# Altium PCB PCB1.PcbDoc
Units mm, origin at the board's own origin, x right, y up, seen from the top; angles counter-clockwise.
Board outline 219.07 x 105.41 mm, 2 copper layers (Top Layer, Bottom Layer); 56 components, 44 nets, 192 pads, 36 vias.
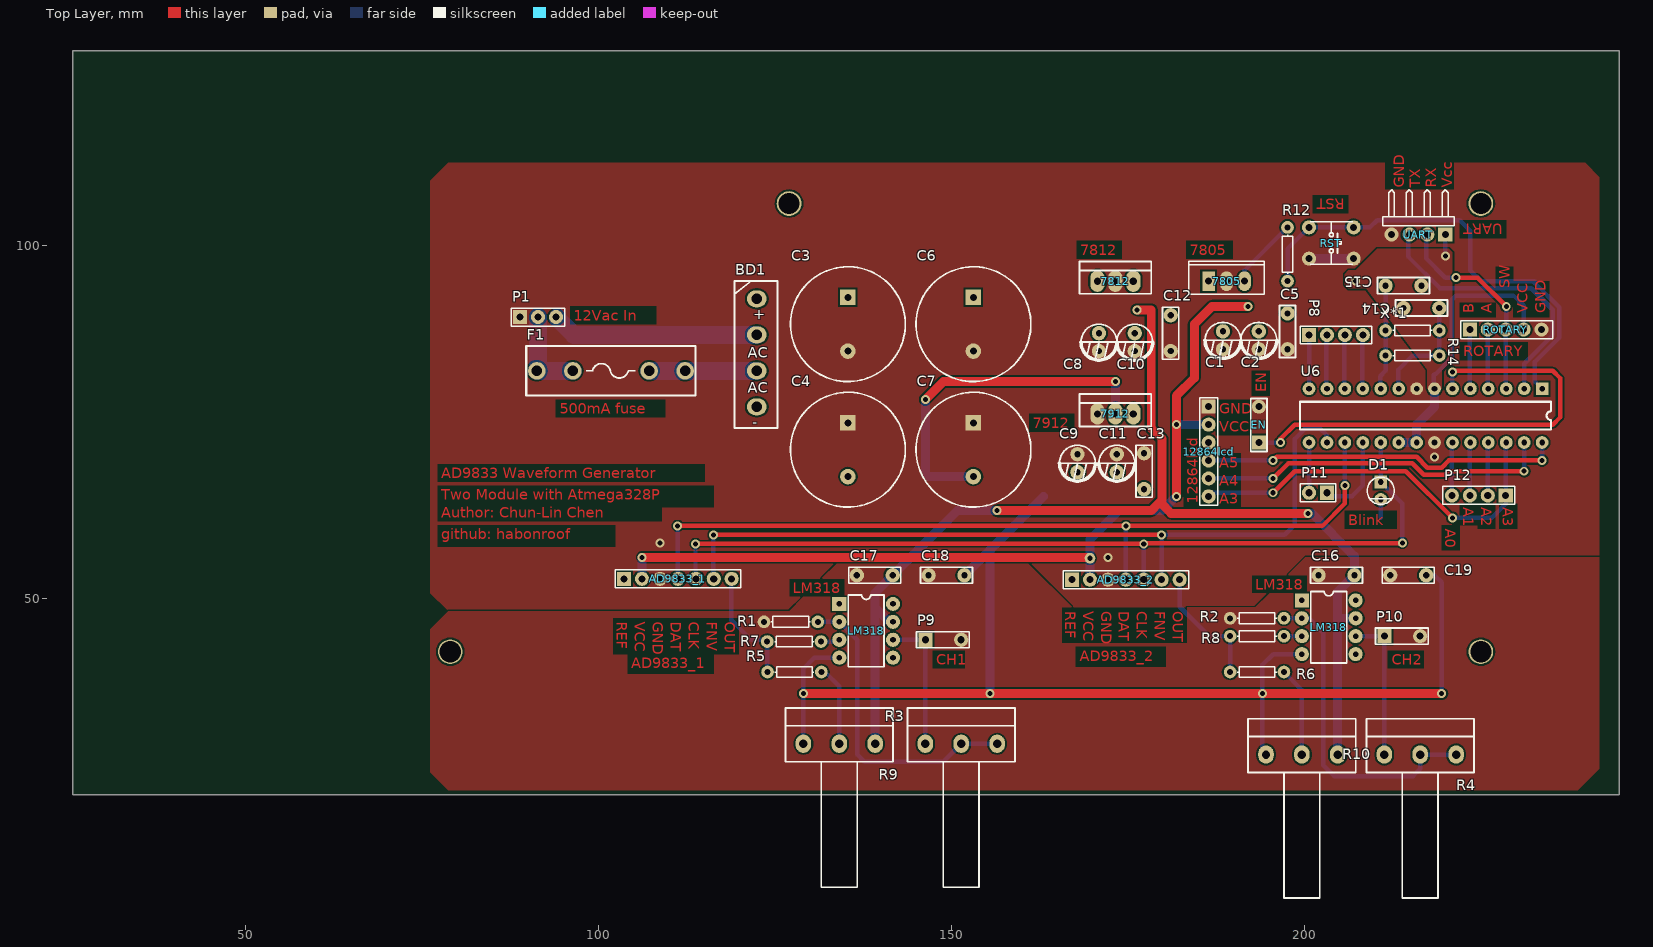
[diagram p0: Top Layer view]
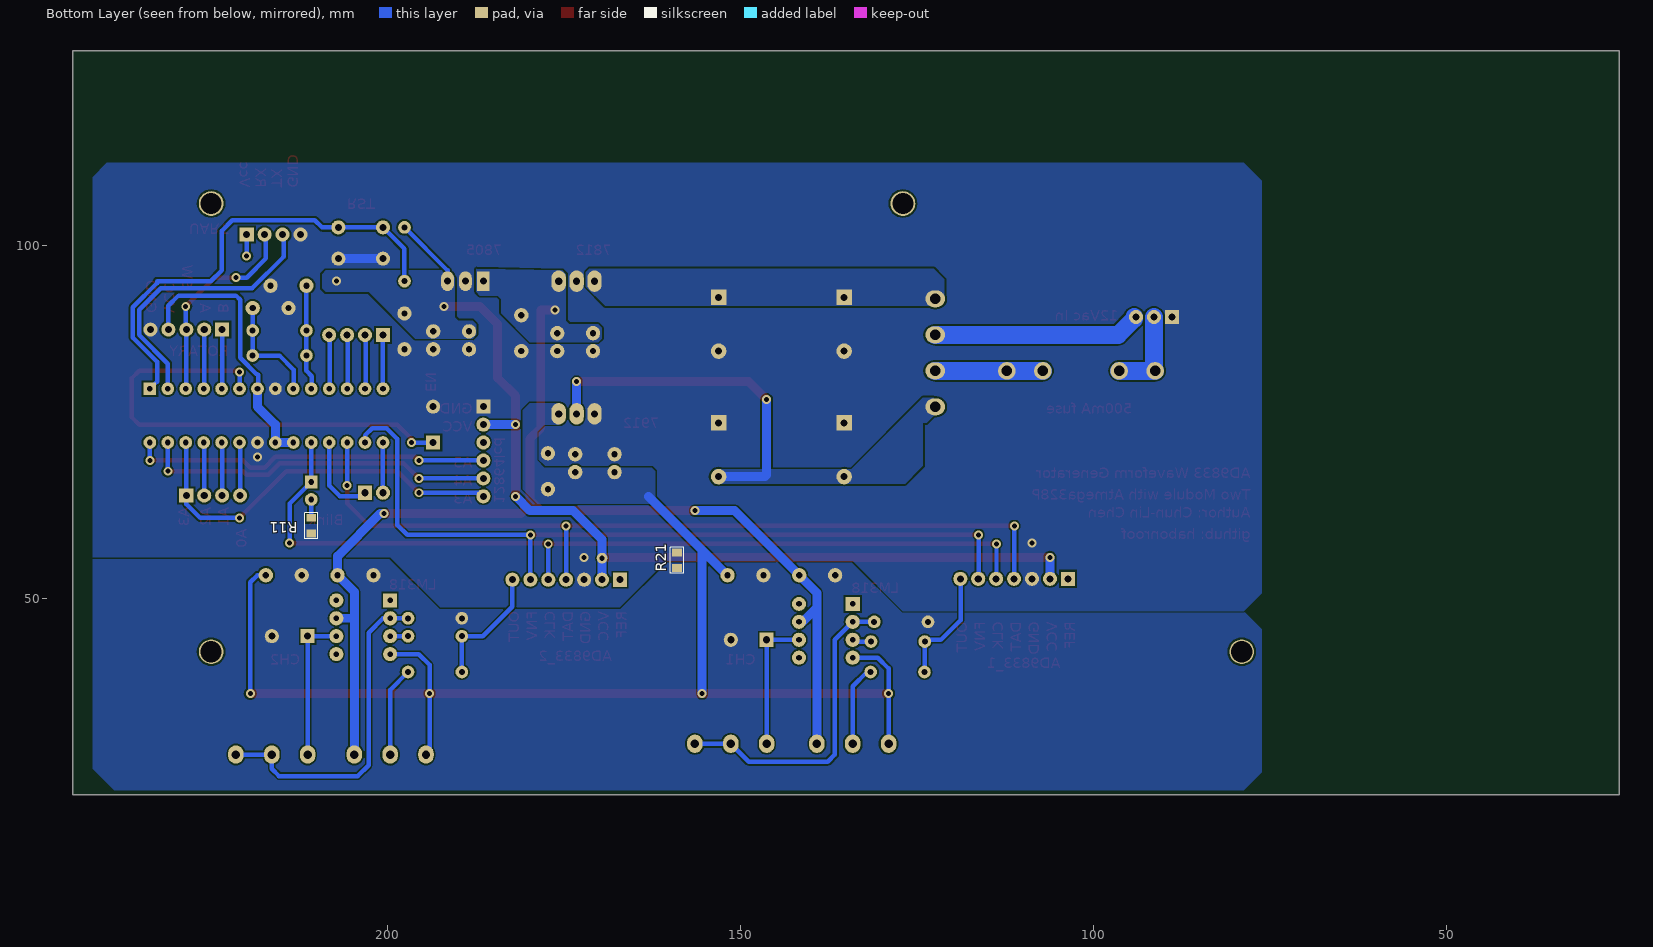
[diagram p1: Bottom Layer view, seen from below]

## Layer stack, top to bottom
Top Solder: solder mask 0.0102, Solder Resist, Dk 3.5
Top Layer: signal copper 0.0356
Dielectric 1: dielectric 0.32, FR-4, Dk 4.8
Bottom Layer: signal copper 0.0356
Bottom Solder: solder mask 0.0102, Solder Resist, Dk 3.5

## Board outline
25.527,22.225 244.602,22.225 244.602,127.635 25.527,127.635

## Design rules (kind name [scope] priority, off if disabled: settings)
Clearance [All] p1: gap=0.254
PlaneConnect [All] p1: planeconnectstyle=Direct reliefexpansion=0.508 reliefentries=4 reliefconductorwidth=0.254 reliefairgap=0.254
PolygonConnect [All] p1: connectstyle=Direct reliefconductorwidth=0.254 reliefentries=4 polygonreliefangle="90 Angle" airgapwidth=0.254
RoutingVias [All] p1: holewidth=0.711 width=1.27 viastyle="Through Hole" minholewidth=0.711 minwidth=1.27 maxholewidth=0.711 maxwidth=1.27
SolderMaskExpansion [All] p1: expansion=0.102
Width [All] p1: maxlimit=5.08 minlimit=0.254 preferedwidth=1.27
29 further rules are at their usual default settings.

## Components (designator, comment, footprint, x,y, rotation, side; value= is the part's Value field where it differs from the comment)
7805 "Regulator_7805" TO-220#1 188.976,94.996 r0 top (schematic designator U1)
7812 "7812" TO-220#2 173.228,94.996 r0 top (schematic designator U2)
7912 "7915" TO-220#2 173.228,76.2 r0 top (schematic designator U3)
12864lcd "12684LCD" HDR1X6 186.436,77.216 r270 top (schematic designator P4)
AD9833_1 "AD9833 Module" HDR1X7 103.632,52.832 r0 top (schematic designator P5)
AD9833_2 "AD9833 Module" HDR1X7 167.085,52.705 r0 top (schematic designator P6)
BD1 "Bridge" Bridge_KBL406 124.841,83.987 r0 top
C1 "JACKON LHK 100uF/10V" RAD-100_200 188.468,86.614 r270 top
C2 "JACKON LHK 100uF/10V" RAD-100_200 193.548,86.614 r270 top
C3 "1000uF/50V" Cap_M_1000uF/50V 135.335,88.9 r270 top
C4 "1000uF/50V" Cap_M_1000uF/50V 135.335,71.12 r270 top
C5 "100n/100V" CAP-200_100*300 197.612,87.884 r90 top
C6 "1000uF/50V" Cap_M_1000uF/50V 153.115,88.9 r270 top
C7 "1000uF/50V" Cap_M_1000uF/50V 153.115,71.12 r270 top
C8 "JACKON LHK 47uF/35V" RAD-100_200 170.895,86.36 r270 top
C9 "JACKON LHK 47uF/35V" RAD-100_200 167.847,69.215 r270 top
C10 "JACKON LHK 47uF/35V" RAD-100_200 175.975,86.36 r270 top
C11 "JACKON LHK 47uF/35V" RAD-100_200 173.435,69.215 r270 top
C12 "100n/100V" CAP-200_100*300 181.055,87.63 r90 top
C13 "100n/100V" CAP-200_100*300 177.292,68.072 r90 top
C14 "22p/1kV" CAP-200_100*300 216.582,91.186 r0 top
C15 "22p/1kV" CAP-200_100*300 214.042,94.361 r180 top
C16 "100n/100V" CAP-200_100*300 204.55,53.34 r180 top
C17 "100n/100V" CAP-200_100*300 139.145,53.34 r180 top
C18 "100n/100V" CAP-200_100*300 149.305,53.34 r0 top
C19 "100n/100V" CAP-200_100*300 214.71,53.34 r0 top
D1 "LED" LED_SMALL 210.82,65.313 r0 top
EN "OUTPUT EN" HDR1X2_1 193.548,74.676 r90 top (schematic designator P2)
F1 "Fuse" FUSE 91.268,82.296 r0 top
LM318 "LM381" DIP-8 138.024,45.201 r0 top (schematic designator U4)
LM318 "LM381" DIP-8 203.556,45.709 r0 top (schematic designator U5)
P1 "12-0-12" HDR1X3 88.9,89.916 r0 top
P8 "Header 4" HDR1X4 200.66,87.376 r0 top
P9 "CH1_Out" HDR1X2_1 148.844,44.196 r0 top
P10 "CH2_out" HDR1X2_1 213.868,44.704 r0 top
P11 "Header 2" HDR1X2 203.2,65.024 r180 top
P12 "Header 4" HDR1X4 228.52,64.643 r180 top
R1 "2k" R-0.25W 127.254,46.736 r180 top
R2 "2k" R-0.25W 193.294,47.244 r180 top
R3 "100k" VR-Medium 151.384,29.464 r0 top
R4 "100k" VR-Medium 216.408,27.94 r0 top
R5 "2k" R-0.25W 127.762,39.624 r0 top
R6 "2k" R-0.25W 193.294,39.624 r0 top
R7 "2k" R-0.25W 127.715,43.942 r180 top
R8 "2k" R-0.25W 193.294,44.704 r180 top
R9 "10k" VR-Medium 134.112,29.464 r0 top
R10 "10k" VR-Medium 199.644,27.94 r0 top
R11 "220" RS0805 210.82,61.468 r90 bottom
R12 "10k" R-0.25W 197.612,98.806 r90 top
R14 "1M" R-0.25W 215.312,84.455 r180 top
R21 "0" RS0805 159.004,54.356 r270 bottom (schematic designator R13)
ROTARY "Header 5" HDR1X5 223.44,88.138 r0 top (schematic designator P3)
RST "SW PB" Button 203.82,100.401 r270 top (schematic designator S1)
U6 "IC" DIP-28 233.68,79.756 r270 top
UART "UART Port" HDR1X4H 219.964,101.6 r180 top (schematic designator P7)
X*1 "16MHz" R-0.25W 215.312,88.011 r180 top

## Footprints (in the part's own frame and the unit in brackets; to place one, negate y for a bottom-side part, rotate by r counter-clockwise, add the part's x,y. Pads: shape width x height; smd on the part's side, far side on the other; paste and mask are expansions set on the pad)
Bridge_KBL406 [mm]
  oval 2.8x2.4 hole 1.5: 1(-2.413,3.409) 2(-2.413,-1.691) 3(-2.413,8.509) 4(-2.413,-6.791)
  silkscreen extent -5.59,-9.78 0.51,11.05
Button [mm]
  round 2 hole 1: 1(-2.215,3.16) 1(-2.215,-3.16) 2(2.215,3.16) 2(2.215,-3.16)
  silkscreen extent -3,-3 3,3
CAP-200_100*300 [mil]
  round 80 hole 35: 1(-100,0) 2(100,0)
  silkscreen extent -145,-45 145,45, body extent -150,-50 150,50
Cap_M_1000uF/50V [mm] "Diameter : 16mm"
  rect 2.2x2.2 hole 1: 1(-3.81,0)
  round 2.2 hole 1: 2(3.81,0)
  silkscreen extent -8.13,-8.13 8.13,8.13
DIP-8 [mm] "DIP-8"
  rect 2x2 hole 0.8: 1(-3.912,4.075)
  round 2 hole 0.8: 2(-3.912,1.535) 3(-3.912,-1.005) 4(-3.912,-3.545) 5(3.708,-3.545) 6(3.708,-1.005) 7(3.708,1.535) 8(3.708,4.075)
  silkscreen extent -2.64,-4.81 2.44,5.35
DIP-28 [mm]
  rect 1.8x1.8 hole 0.8: 1(0,0)
  round 1.8 hole 0.8: 2(0,-2.54) 3(0,-5.08) 4(0,-7.62) 5(0,-10.16) 6(0,-12.7) 7(0,-15.24) 8(0,-17.78) 9(0,-20.32) 10(0,-22.86) 11(0,-25.4) 12(0,-27.94) 13(0,-30.48) 14(0,-33.02) 15(7.62,-33.02) 16(7.62,-30.48) 17(7.62,-27.94) 18(7.62,-25.4) 19(7.62,-22.86) 20(7.62,-20.32) 21(7.62,-17.78) 22(7.62,-15.24) 23(7.62,-12.7) 24(7.62,-10.16) 25(7.62,-7.62) 26(7.62,-5.08) 27(7.62,-2.54) 28(7.62,0)
  silkscreen extent 1.83,-34.29 5.79,1.27
FUSE [mm]
  round 2.5 hole 1.5: 1(0,0) 1(5.1,0) 2(15.9,0) 2(21,0)
  silkscreen extent -1.5,-3.5 22.5,3.5
HDR1X2 [mm]
  rect 2x2 hole 1: 1(0,0)
  round 2 hole 1: 2(2.54,0)
  silkscreen extent -1.27,-1.27 3.81,1.27
HDR1X2_1 [mm]
  rect 2x2 hole 1: 1(-2.54,0)
  round 2 hole 1: 2(2.54,0)
  silkscreen extent -3.81,-1.14 3.68,1.14
HDR1X3 [mm]
  rect 2x2 hole 1: 1(0,0)
  round 2 hole 1: 2(2.54,0) 3(5.08,0)
  silkscreen extent -1.27,-1.27 6.35,1.27
HDR1X4 [mm]
  rect 2x2 hole 1: 1(0,0)
  round 2 hole 1: 2(2.54,0) 3(5.08,0) 4(7.62,0)
  silkscreen extent -1.27,-1.27 8.89,1.27
HDR1X4H [mm]
  rect 2x2 hole 1: 1(0,0)
  round 2 hole 1: 2(2.54,0) 3(5.08,0) 4(7.62,0)
  silkscreen extent -1.27,-6.35 8.89,-1.27
HDR1X5 [mm]
  rect 2x2 hole 1: 1(0,0)
  round 2 hole 1: 2(2.54,0) 3(5.08,0) 4(7.62,0) 5(10.16,0)
  silkscreen extent -1.27,-1.27 11.72,1.27
HDR1X6 [mm]
  rect 2x2 hole 1: 1(0,0)
  round 2 hole 1: 2(2.54,0) 3(5.08,0) 4(7.62,0) 5(10.16,0) 6(12.7,0)
  silkscreen extent -1.27,-1.27 13.97,1.27
HDR1X7 [mm]
  rect 2x2 hole 1: 1(0,0)
  round 2 hole 1: 2(2.54,0) 3(5.08,0) 4(7.62,0) 5(10.16,0) 6(12.7,0) 7(15.24,0)
  silkscreen extent -1.27,-1.27 16.51,1.27
LED_SMALL [mm]
  rect 1.8x1.8 hole 0.8: 1(0,1.235)
  round 1.8 hole 0.8: 2(0,-1.235)
  silkscreen extent -1.92,-1.92 1.92,1.92
R-0.25W [mm]
  round 1.8 hole 0.85: 1(-3.81,0) 2(3.81,0)
  silkscreen extent -2.77,-0.76 2.77,0.76
RAD-100_200 [mil]
  round 80 hole 35: 1(-50,0) 2(50,0)
  silkscreen extent -100,-100 100,100, body extent -100,-100 100,100
RS0805 [mm]
  rect 1.1x1.4 smd mask+0.02: 1(0,0) 2(-2.2,0)
  silkscreen extent -2.95,-0.95 0.75,0.95
TO-220#1 [mm]
  rect 1.8x2.8 hole 1: 1(-2.54,0)
  oval 1.8x2.8 hole 1: 2(0,0) 3(2.54,0)
  silkscreen extent -5.35,-1.85 5.35,2.85
TO-220#2 [mm]
  oval 2.032x3.048 hole 1.016: 1(-2.54,0) 2(0,0) 3(2.54,0)
  silkscreen extent -5.08,-1.78 5.08,2.79, body extent -5.21,-1.91 5.21,2.92
VR-Medium [mm] "炭膜可變電阻"
  oval 2.2x2.6 hole 1.2: 1(-5.08,0) 2(0,0) 3(5.08,0)
  silkscreen extent -7.62,-20.32 7.62,5.08

## Part data
7805: library part Regulator-7805, "Voltage Regulator"
7812: library part 7805, "THREE TERMINAL POSITIVE VOLTAGE REGULATORS"
7912: "THREE TERMINAL NEGATIVE VOLTAGE REGULATORS"
12864lcd: library part "Header 6", "Header, 6-Pin"
AD9833_1 AD9833_2: library part "Header 7", "Header, 7-Pin"
BD1: "全波整流器"
C1 C2 C8 C9 C10 C11: "JACKON LHK General Purpose"
C3 C4 C6 C7: library part Cap_EC_Medium, "有極性電解電容(中)"
C5 C12 C13 C16 C17 C18 C19: "Metallized Polyester Film Capacitor"
C14 C15: "Ceramic Capacitor"
EN P9 P10: library part "Header 2", "Header, 2-Pin"
LM318 LM318: library part LM318, "Single OPA SR:50v/uS"
P1: library part "Header 3", "Header, 3-Pin"
P8 P12: "Header, 4-Pin"
P11: "Header, 2-Pin"
R1 R2 R5 R6 R7 R8 R11 R12 R14 R21: library part Resistor, "固定電阻"
R3 R4 R9 R10: library part Resistor_Potentiometer, "可變電阻"
ROTARY: "Header, 5-Pin"
RST: "Button Switch"
U6: library part Atmega328P, "Arduino controller"
UART: library part "Header 4", "Header, 4-Pin"
X*1: library part XTAL, "Crystal Oscillator"

## Free pads (board coordinates)
  round 3.5 hole 3: 2(79,42.5) 2(127,106) 2(225,42.5) 2(225,106)
  round 1.524 hole 0.762: 3(169.625,55.753)

## Via types
v1: diameter 1.27, hole 0.711, Top Layer to Bottom Layer, 36 vias

## Nets (pads, with @x,y where several pads share a name; then routed paths per layer and width w, separated by ;. In a path a pad name is that pad's centre, name@x,y a point inside that pad or via, vN(x,y) a via of type N, cw(c..) or ccw(c..) an arc to the next point about the centre after c; other vN are vias at no path point)
+12V: 7805.1 7812.3 C8.1 C10.1 C12.2 C16.1 C17.1 LM318.7 R9.3 R10.3 | length 163.1
  Top Layer w1.27: v1(156.464,62.484) 178.308,62.484 179.324,63.5 ; v1(176.276,90.932) 178.308,90.932 178.308,74.168 179.832,72.644 179.832,64.008 179.324,63.5 ; v1(200.533,62.103) 181.106,62.103 179.832,63.377 179.832,63.5 179.324,63.5
  Bottom Layer w1.27: R9.3 139.192,48.768 ; LM318.7@141.685,46.99 141.431,46.736 141.224,46.736 139.192,48.768 ; v1(156.464,62.484) 150.829,62.484 C17.1 139.192,50.847 139.192,48.768 ; v1(200.533,62.103) 201.041,62.103 207.09,56.054 C16.1 204.724,50.974 204.724,47.244 ; R10.3 204.724,47.244 ; LM318.7@207.264,47.244 204.724,47.244
-12V: 7912.3 C9.2 C11.2 C13.1 C18.2 C19.2 LM318.4 R9.1 R10.1 | length 180.2
  Top Layer w1.27: v1(129.032,36.576) v1(155.448,36.576) v1(194.056,36.576) v1(219.456,36.576)
  Bottom Layer w0.635: R9.1@129.032,29.972 v1(129.032,36.576) 129.032,40.132 130.556,41.656 133.303,41.656 133.811,42.164 LM318.4@134.065,41.91 ; C18.2 C18.2@151.892,53.34 ; R10.1 194.056,28.448 v1(194.056,36.576) 194.056,40.64 195.58,42.164 199.216,42.164 LM318.4@199.47,41.91 ; C19.2 218.44,53.34 219.456,52.324 v1(219.456,36.576)
  Bottom Layer w1.27: C18.2@151.892,53.34 155.448,56.896 ; v1(155.448,36.576) 155.448,56.896 ; 163.068,64.516 155.448,56.896
A: ROTARY.2 U6.4 | length 8.3
  Bottom Layer w0.635: U6.4@225.98,79.883 ROTARY.2
AGND: C16.2 C17.2 C18.1 C19.1 P9.2 P10.2 R1.2 R2.2 R21.1
B: ROTARY.1 U6.5 | length 8.3
  Bottom Layer w0.635: U6.5@223.44,79.883 ROTARY.1
BUSY: 12864lcd.6 P12.1 U6.26 | length 55.9
  Top Layer w0.635: v1(195.58,65.024) 198.628,68.072 214.376,68.072 v1(220.98,61.468)
  Bottom Layer w0.635: 12864lcd.6 186.944,65.024 v1(195.58,65.024) ; v1(220.98,61.468) 226.568,61.468 228.52,63.42 P12.1 U6.26@228.52,72.263
CH1_OUT: LM318.6@141.732,44.196 P9.1 R3.1 | length 19.3
  Bottom Layer w0.635: LM318.6@141.732,44.196 P9.1 R3.1
CH2_OUT: LM318.6@207.264,44.704 P10.1 R4.1 | length 21.3
  Bottom Layer w0.635: LM318.6@207.264,44.704 P10.1 ; R4.1 P10.1 ; P10.1@211.836,44.704 P10.1
D13: AD9833_1.5 AD9833_2.5 D1.1 U6.19 | length 125.4
  Top Layer w0.635: v1(113.745,57.785) v1(177.245,57.785) 177.309,57.848 v1@213.296,57.848 ; D1.1@210.82,66.478 D1.1
  Bottom Layer w0.635: AD9833_1.5@113.745,52.705 v1(113.745,57.785) ; AD9833_2.5 v1(177.245,57.785) v1@177.309,57.848 ; U6.19 D1.1 213.868,63.5 v1(213.868,57.912)
FNC: AD9833_1.6 AD9833_2.6 U6.16 | length 114.5
  Top Layer w0.635: v1(116.285,59.055) v1(179.785,59.055)
  Bottom Layer w0.635: AD9833_1.6@116.285,52.705 v1(116.285,59.055) ; AD9833_2.6 v1(179.785,59.055) 197.231,59.055 198.628,60.452 198.628,72.644 200.152,74.168 202.184,74.168 203.2,73.152 U6.16
GND: 7805.2 7812.2 7912.1 12864lcd.1 AD9833_1.3 AD9833_2.3 C1.2 C2.2 C3.2 C4.1 C5.1 C6.2 C7.1 C8.2 C9.1 C10.2 C11.1 C12.1 C13.2 C14.1 C15.1 EN.2 P1.1 R11.2 R21.2 ROTARY.5 RST.2 U6.8 U6.22 UART.4 | length 6.3
  Bottom Layer w1.27: RST.2@200.66,98.186 RST.2@206.98,98.186
  other v1: 172.212,55.88 108.712,57.912 218.44,70.104
NetBD1_1: BD1.1 P1.3 | length 29.4
  Bottom Layer w2.54: P1.3@94.234,89.916 94.234,89.662 96.5,87.396 BD1.1
NetBD1_2: BD1.2 F1.2 | length 15.3
  Bottom Layer w2.54: F1.2@107.168,82.296 112.268,82.296 BD1.2
NetBD1_3: 7812.1 BD1.3 C3.1 C6.1
NetBD1_4: 7912.2 BD1.4 C4.2 C7.2 | length 50.1
  Top Layer w1.27: v1(146.304,78.232) 148.844,80.772 v1(173.228,80.772)
  Bottom Layer w1.27: v1(146.304,78.232) 146.304,67.564 146.558,67.31 C7.2 ; 7912.2 v1(173.228,80.772)
NetC14_2: C14.2 R14.1 U6.9 X*1.1 | length 16
  Bottom Layer w0.635: U6.9@213.28,79.883 213.28,82.423 215.312,84.455 R14.1 X*1.1 C14.2
NetC15_2: C15.2 R14.2 U6.10 X*1.2 | length 14.8
  Bottom Layer w0.635: U6.10@210.74,79.883 210.74,81.534 211.502,82.296 R14.2 X*1.2 C15.2
NetD1_2: D1.2 R11.1 | length 2.5
  Bottom Layer w0.635: R11.1 D1.2@210.82,64.008
NetF1_1: F1.1 P1.2 | length 12.8
  Bottom Layer w2.54: P1.2 91.44,82.468 91.268,82.296 F1.1@96.368,82.296
NetP8_1: P8.1 U6.14 | length 7.6
  Bottom Layer w0.635: U6.14 P8.1
NetP8_2: P8.2 U6.13 | length 7.6
  Bottom Layer w0.635: U6.13@203.12,79.883 P8.2@203.12,87.503
NetP8_3: P8.3 U6.12 | length 7.6
  Bottom Layer w0.635: U6.12@205.66,79.883 P8.3@205.66,87.503
NetP8_4: P8.4 U6.11 | length 7.6
  Bottom Layer w0.635: U6.11@208.2,79.883 P8.4@208.2,87.503
NetP11_1: P11.1 U6.18 | length 12
  Bottom Layer w0.635: P11.1 203.708,64.516 206.756,64.516 208.28,66.04 U6.18
NetP11_2: P11.2 U6.15 | length 7.6
  Bottom Layer w0.635: P11.2@200.66,64.516 P11.2 U6.15
NetP12_2: P12.2 U6.25 | length 7.6
  Bottom Layer w0.635: P12.2 U6.25@225.98,72.263
NetP12_3: P12.3 U6.24 | length 7.6
  Bottom Layer w0.635: P12.3 U6.24@223.44,72.263
NetP12_4: P12.4 U6.23 | length 7.6
  Bottom Layer w0.635: P12.4 U6.23@220.9,72.263
NetR1_1: LM318.2@134.112,46.736 R1.1 R3.2 R3.3 | length 44.2
  Bottom Layer w0.635: R1.1 134.112,46.736 136.652,44.196 136.652,27.94 137.668,26.924 148.844,26.924 R3.2 R3.3
NetR2_1: LM318.2@199.644,47.244 R2.1 R4.2 R4.3 | length 47.1
  Bottom Layer w0.635: R2.1 199.644,47.244 200.66,47.244 202.692,45.212 202.692,26.416 204.216,24.892 215.392,24.892 216.408,25.908 R4.2 R4.3
NetR5_2: R5.2 R9.2 | length 11.5
  Bottom Layer w0.635: R5.2 132.08,39.624 134.112,37.592 R9.2
NetR6_2: R6.2 R10.2 | length 12.7
  Bottom Layer w0.635: R6.2 199.644,37.084 R10.2
NetR7_1: LM318.3@134.112,44.196 R7.1 | length 2.5
  Bottom Layer w0.635: R7.1 LM318.3@134.065,43.942
NetR8_1: LM318.3@199.644,44.704 R8.1 | length 2.5
  Bottom Layer w0.635: R8.1 LM318.3@199.644,44.704
NetR12_1: R12.1 RST.1 U6.1 | length 66.7
  Bottom Layer w0.635: R12.1 197.612,99.568 200.66,102.616 206.98,102.616 209.296,102.616 210.312,103.632 221.996,103.632 223.52,102.108 223.52,96.52 225.044,94.996 232.664,94.996 232.664,94.729 236.093,91.3 236.093,87.008 232.664,83.579 232.664,80.772 U6.1
"O/P EN": EN.1 U6.6 | length 68.1
  Top Layer w0.635: v1(196.596,72.136) 196.596,72.644 198.628,74.676 235.204,74.676 236.22,75.692 236.22,81.28 235.204,82.296 221.154,82.296 v1(220.98,82.122)
  Bottom Layer w0.635: EN.1 v1(196.596,72.136) ; U6.6 v1(220.98,82.122)
OUT1: AD9833_1.7 R5.1 R7.2 | length 16
  Bottom Layer w0.635: AD9833_1.7@118.825,52.705 118.825,46.99 121.619,44.196 123.905,44.196 R7.2 123.905,40.179 R5.1@123.952,40.132
OUT2: AD9833_2.7 R6.1 R8.2 | length 17.8
  Bottom Layer w0.635: AD9833_2.7 182.325,48.895 186.516,44.704 R8.2 R6.1
RX: U6.2 UART.3 | length 39.6
  Bottom Layer w0.635: UART.3@214.71,101.6 214.71,98.425 214.763,98.425 219.208,93.98 232.156,93.98 235.204,90.932 235.204,87.376 231.14,83.312 U6.2
SCL: 12864lcd.4 U6.28 | length 50.8
  Top Layer w0.635: v1(195.58,69.596) 196.088,70.104 215.9,70.104 217.424,68.58 219.456,68.58 220.472,69.596 v1(233.68,69.596)
  Bottom Layer w0.635: 12864lcd.4@186.77,69.85 187.024,69.596 v1(195.58,69.596) ; v1(233.68,69.596) U6.28
SDA: 12864lcd.5 U6.27 | length 50.6
  Top Layer w0.635: v1(195.58,67.056) 197.739,69.215 215.265,69.215 216.916,67.564 219.964,67.564 220.472,68.072 v1(231.14,68.072)
  Bottom Layer w0.635: 12864lcd.5 v1(195.58,67.056) ; v1(231.14,68.072) U6.27
SDAT: AD9833_1.4 AD9833_2.4 U6.17 | length 119.4
  Top Layer w0.635: v1(111.205,60.325) v1(174.705,60.325) 202.565,60.325 205.74,63.5 v1(205.74,66.04)
  Bottom Layer w0.635: AD9833_1.4@111.205,52.705 v1(111.205,60.325) ; AD9833_2.4 v1(174.705,60.325) ; v1(205.74,66.04) U6.17@205.74,71.819
SW: ROTARY.3 U6.3 UART.2 | length 29.1
  Top Layer w0.635: v1(221.488,95.504) 224.536,95.504 v1(228.6,91.44)
  Bottom Layer w0.635: UART.2@217.25,101.6 217.25,98.218 219.964,95.504 v1(221.488,95.504) ; U6.3@228.52,79.883 ROTARY.3 228.6,88.218 v1(228.6,91.44)
VCC: 7805.3 12864lcd.2 AD9833_1.2 AD9833_2.2 C1.1 C2.1 C5.2 pad.3 R12.2 ROTARY.4 U6.7 U6.20 U6.21 UART.1 | length 178.3
  Top Layer w1.27: v1(106.172,55.88) 169.498,55.88 pad.3 ; v1(181.864,64.516) v1(181.864,74.676) 181.864,78.74 184.404,81.28 184.404,88.9 186.944,91.44 v1(192.024,91.44)
  Bottom Layer w0.635: 7805.3 191.516,96.52 R12.2 ; U6.7@218.36,79.883 218.36,81.708 218.44,81.788 218.536,81.788 220.9,84.152 220.9,92.376 221.488,92.964 229.616,92.964 231.06,91.52 ROTARY.4 ; v1(219.964,98.552) UART.1
  Bottom Layer w1.27: AD9833_1.2 v1(106.172,55.88) ; pad.3@169.498,55.88 pad.3 ; AD9833_2.2 pad.3 ; v1(181.864,64.516) 179.832,62.484 173.736,62.484 169.625,58.373 pad.3 ; v1(181.864,74.676) 12864lcd.2 ; U6.20 U6.21 215.9,74.676 218.44,77.216 U6.7
  other v1: 207.264,94.996
pads on no net: 12864lcd.3 AD9833_1.1 AD9833_2.1 LM318.1 LM318.5 LM318.8

## Polygon pours and split planes (outlines as drawn)
AGND on Bottom Layer "AGND_L02_P051" (solid, remove dead copper, pour order 51): 78.74,48.26 77.216,46.736 76.2,45.72 76.2,25.4 78.74,22.86 238.76,22.86 241.808,25.908 241.808,55.88 199.644,55.88 192.532,48.768 167.132,48.768 160.528,55.372 134.112,55.372 127,48.26
GND on Bottom Layer "GND_L02_P049" (solid, remove dead copper, pour order 49): 78.74,111.76 76.2,109.22 76.2,108.712 76.2,50.8 78.74,48.26 127,48.26 134.112,55.372 160.528,55.372 167.132,48.768 189.484,48.768 192.532,48.768 199.644,55.88 241.808,55.88 241.808,109.728 239.776,111.76
NetBD1_4 on Bottom Layer "NETBD1_4_L02_P014" (solid, remove dead copper, pour order 14): 122.635,78.486 124.159,78.486 134.319,68.326 153.623,68.326 153.623,66.294 127.715,66.294 126.699,66.294 124.667,68.326 124.159,68.834 124.159,74.93 123.651,74.93 122.635,75.946
VCC on Bottom Layer "VCC_L02_P029" (solid, remove dead copper, pour order 29): 191.516,96.52 208.788,96.52 209.296,96.012 209.296,93.98 208.788,93.472 202.692,93.472 196.088,86.868 187.96,86.868 187.452,87.376 187.452,88.9 187.96,89.408 189.992,89.408 190.5,89.916 190.5,95.504
-12V on Bottom Layer "-12V_L02_P023" (solid, remove dead copper, pour order 23): 166.116,68.58 162.56,68.58 173.736,68.58 177.8,68.58 178.816,69.596 178.816,73.66 177.8,74.676 175.768,74.676 175.768,77.724 179.832,77.724 180.848,76.708 180.848,65.532 178.816,63.5 164.592,63.5 162.56,63.5 162.052,64.008 162.052,68.072 162.56,68.58
NetBD1_3 on Bottom Layer "NETBD1_3_L02_P006" (solid, remove dead copper, pour order 6): 170.895,96.774 123.143,96.774 122.635,96.774 121.619,95.758 121.111,95.25 121.111,92.202 122,91.5 122.5,91.5 169.177,91.5 171.911,94.234 171.911,96.266 171.403,96.774
+12V on Bottom Layer "+12V_L02_P008" (solid, remove dead copper, pour order 8): 175.26,96.52 187.452,96.774 187.452,93.472 186.944,92.964 184.404,92.964 183.896,92.456 183.896,90.424 179.832,86.36 170.18,86.36 169.672,86.868 169.672,88.392 170.18,88.9 174.244,88.9 174.752,89.408 174.752,96.012
GND on Bottom Layer "GND_L02_P025" (solid, remove dead copper, pour order 25): 167.64,69.596 177.8,69.596 178.308,70.104 178.308,73.66 177.8,74.168 172.212,74.168 171.704,74.676 171.704,76.2 169.672,76.2 169.672,74.676 169.164,74.168 167.132,74.168 166.116,73.152 166.116,70.104 166.624,69.596
GND on Top Layer "GND_L01_P059" (solid, remove dead copper, pour order 59): 76.2,50.8 78.74,48.26 127,48.26 133.361,54.621 133.723,54.983 160.917,54.983 167.132,48.768 193.04,48.768 200.152,55.88 241.808,55.88 241.808,109.728 239.776,111.76 78.74,111.76 76.2,109.22
AGND on Top Layer "AGND_L01_P053" (solid, remove dead copper, pour order 53): 76.2,45.72 78.74,48.26 127,48.26 134.112,55.372 160.528,55.372 167.132,48.768 193.04,48.768 200.152,55.88 241.808,55.88 241.808,25.908 238.76,22.86 78.74,22.86 76.2,25.4
VCC on Top Layer "VCC_L01_P035" (solid, remove dead copper, pour order 35): 206.248,93.98 208.788,93.98 217.424,82.465 217.424,79.756 219.456,79.756 219.456,82.296 220.98,83.82 220.98,97.536 220.98,99.06 220.472,99.568 210.82,99.568 210.312,99.568 207.264,96.52 206.248,96.52 205.74,96.012 205.74,94.488

## Other copper
Top Layer:
  text "GND / TX / RX / Vcc" at 220.98,108.204 h1.52 r90
  text "SW" at 229.108,93.98 h1.52 r90
  text "B" at 224.028,90.424 h1.52 r90
  text "A" at 226.568,90.424 h1.52 r90
  text "VCC" at 231.648,90.424 h1.52 r90
  text "GND" at 234.188,90.424 h1.52 r90
  text "12Vac In" at 96.52,89.408 h1.52
  text "500mA fuse" at 94.488,76.2 h1.52
  text "GND" at 187.96,76.2 h1.52
  text "VCC" at 187.96,73.66 h1.52
  text "A5" at 187.96,68.58 h1.52
  text "AD9833 Waveform Generator" at 77.724,67.056 h1.52
  text "A4" at 187.96,66.04 h1.52
  text "Two Module with Atmega328P" at 77.724,64.008 h1.52
  text "A3" at 187.96,63.5 h1.52
  text "A1" at 222.504,62.992 h1.52 r270
  text "A2" at 225.044,62.992 h1.52 r270
  text "A3" at 228.092,62.992 h1.52 r270
  text "Author: Chun-Lin Chen" at 77.724,61.468 h1.52
  text "Blink" at 206.248,60.452 h1.52
  text "A0" at 219.964,59.944 h1.52 r270
  text "github: habonroof" at 77.724,58.42 h1.52
  text "REF" at 166.116,48.26 h1.52 r270
  text "VCC" at 168.656,48.26 h1.52 r270
  text "GND" at 171.196,48.26 h1.52 r270
  text "DAT" at 173.736,48.26 h1.52 r270
  text "CLK" at 176.276,48.26 h1.52 r270
  text "FNV" at 178.816,48.26 h1.52 r270
  text "OUT" at 181.356,48.26 h1.52 r270
  text "REF" at 102.616,46.736 h1.52 r270
  text "VCC" at 105.156,46.736 h1.52 r270
  text "GND" at 107.696,46.736 h1.52 r270
  text "DAT" at 110.236,46.736 h1.52 r270
  text "CLK" at 112.776,46.736 h1.52 r270
  text "FNV" at 115.316,46.736 h1.52 r270
  text "OUT" at 117.856,46.736 h1.52 r270
  text "CH1" at 147.828,40.64 h1.52
  text "CH2" at 212.344,40.64 h1.52

## Silkscreen, mask and mechanical layers (free items; w line width, h text height)
Mechanical 1:
  lines w0.254: 75,22.225 75,113.792 188.087,113.792 244.602,113.792 244.602,22.225 75,22.225

## Text inside footprints (layer, text, board x,y; h text height)
BD1: Top Overlay "+" at 121.92,89.575 h1.52; Top Overlay "AC" at 121.158,84.114 h1.52; Top Overlay "AC" at 121.158,79.161 h1.52; Top Overlay "-" at 121.793,74.335 h1.52